# Altium PCB TSAL.PcbDoc
Units mm, origin at the board's own origin, x right, y up, seen from the top; angles counter-clockwise.
Board outline 26.6 x 53.9 mm, 2 copper layers (Top Layer, Bottom Layer), stack 1.671 mm thick; 36 components, 26 nets, 77 pads, 25 vias.
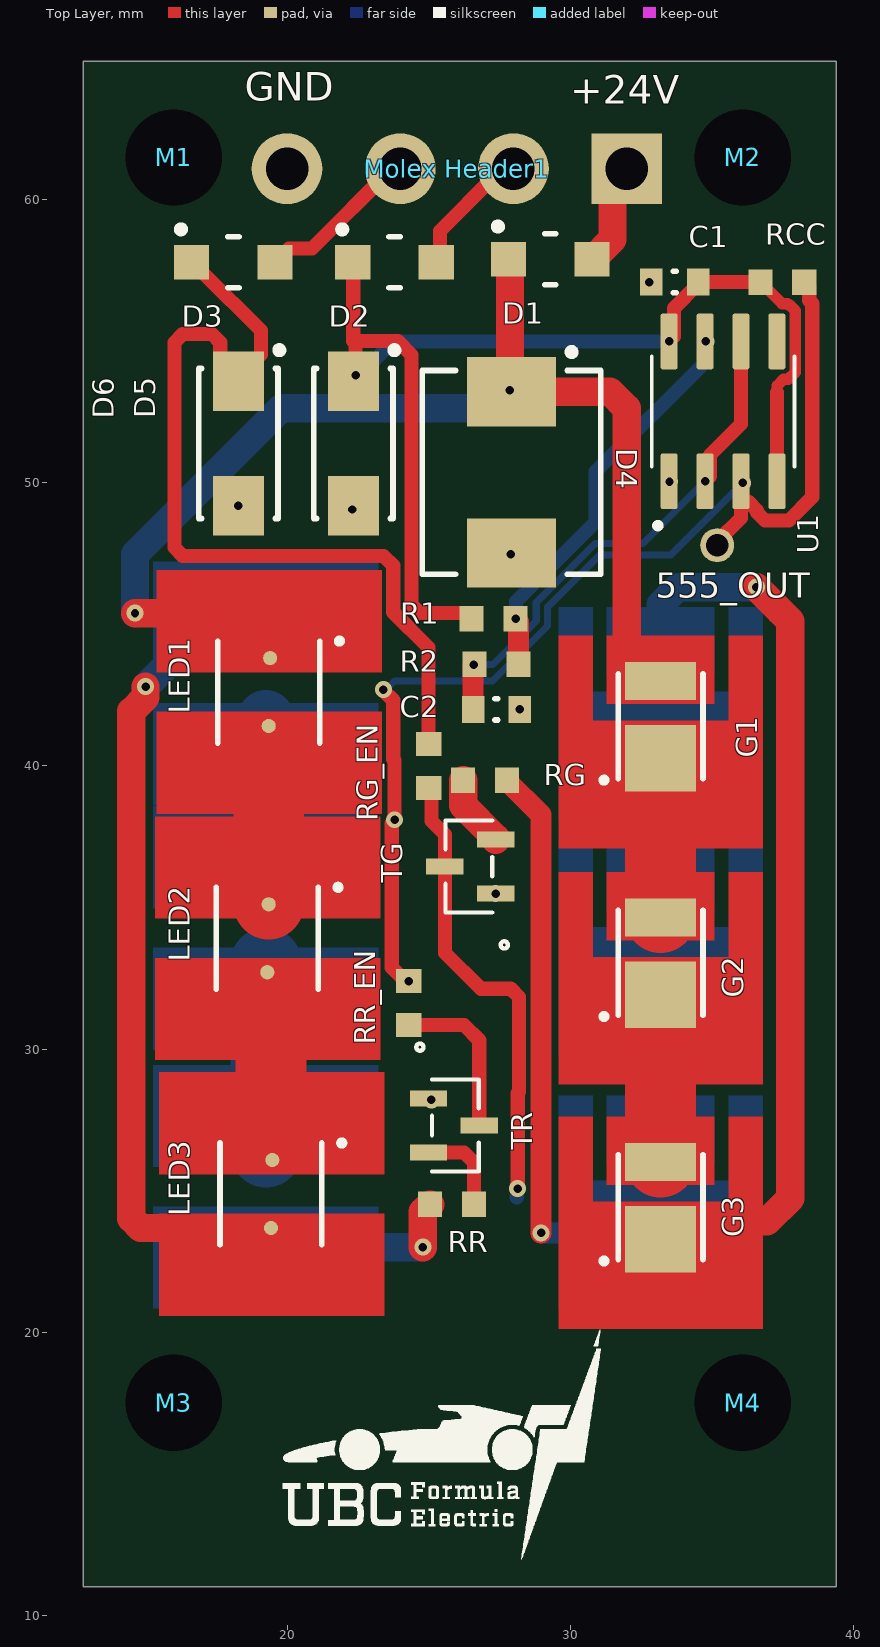
[diagram p0: Top Layer view]
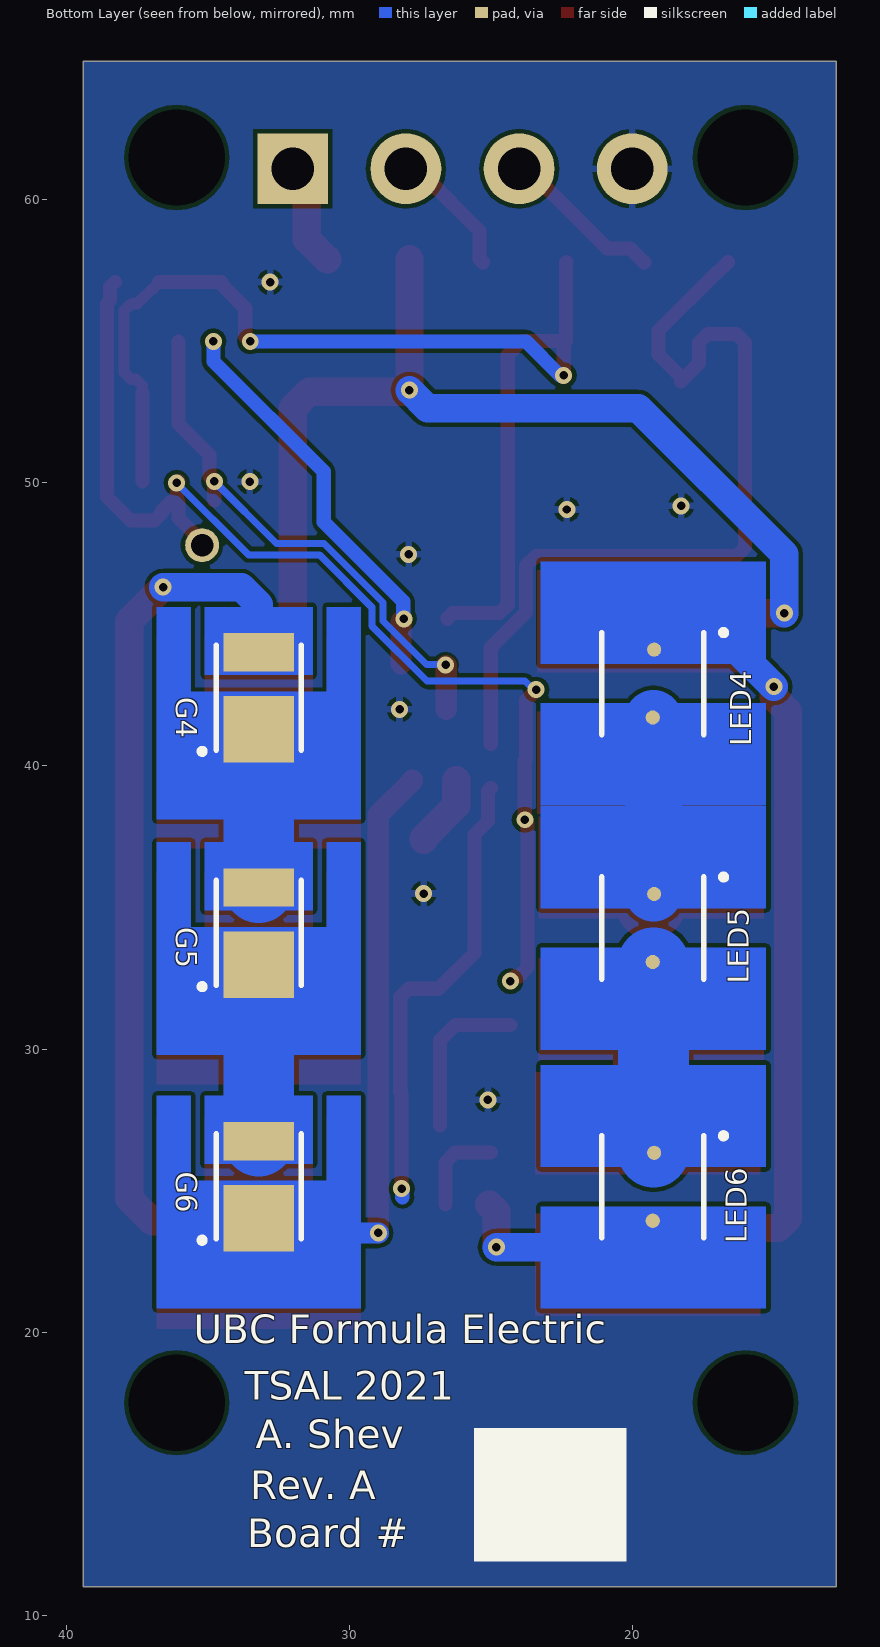
[diagram p1: Bottom Layer view, seen from below]
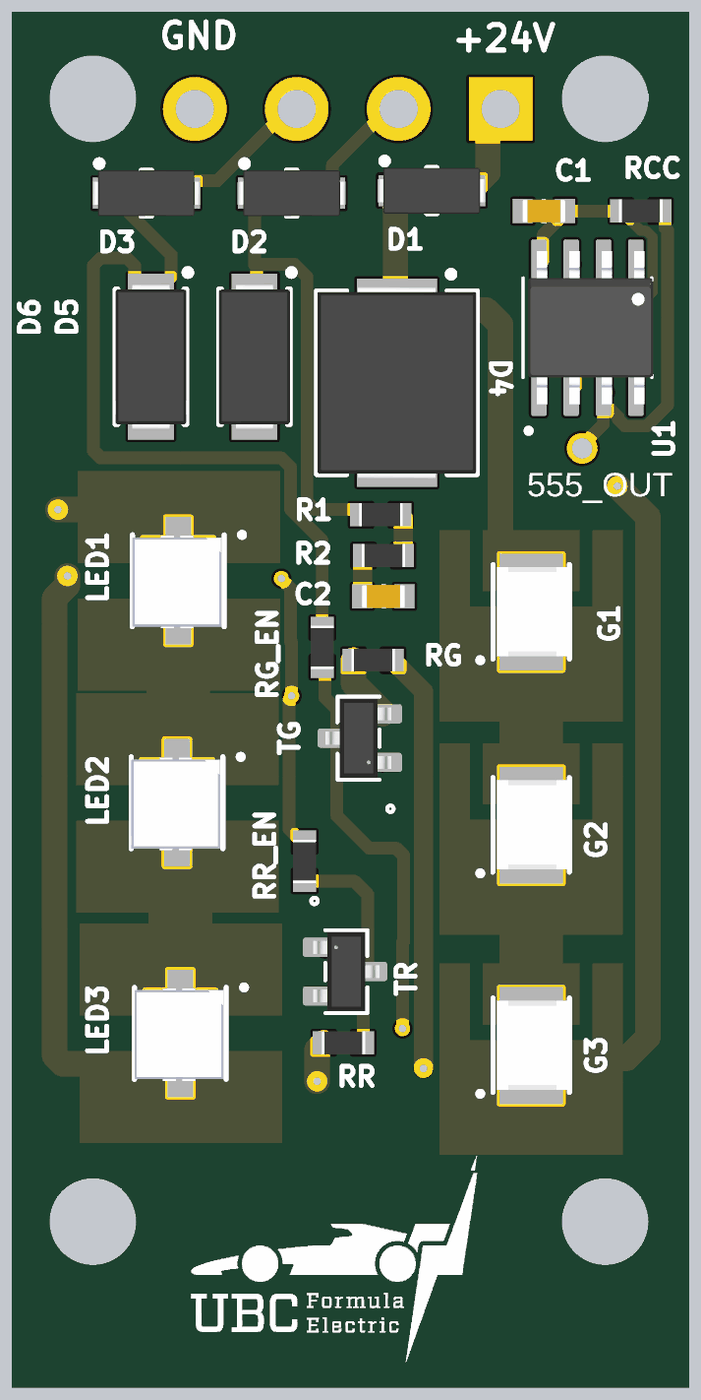
[diagram p2: 3D render of the assembled board from above, using the file's embedded part models]
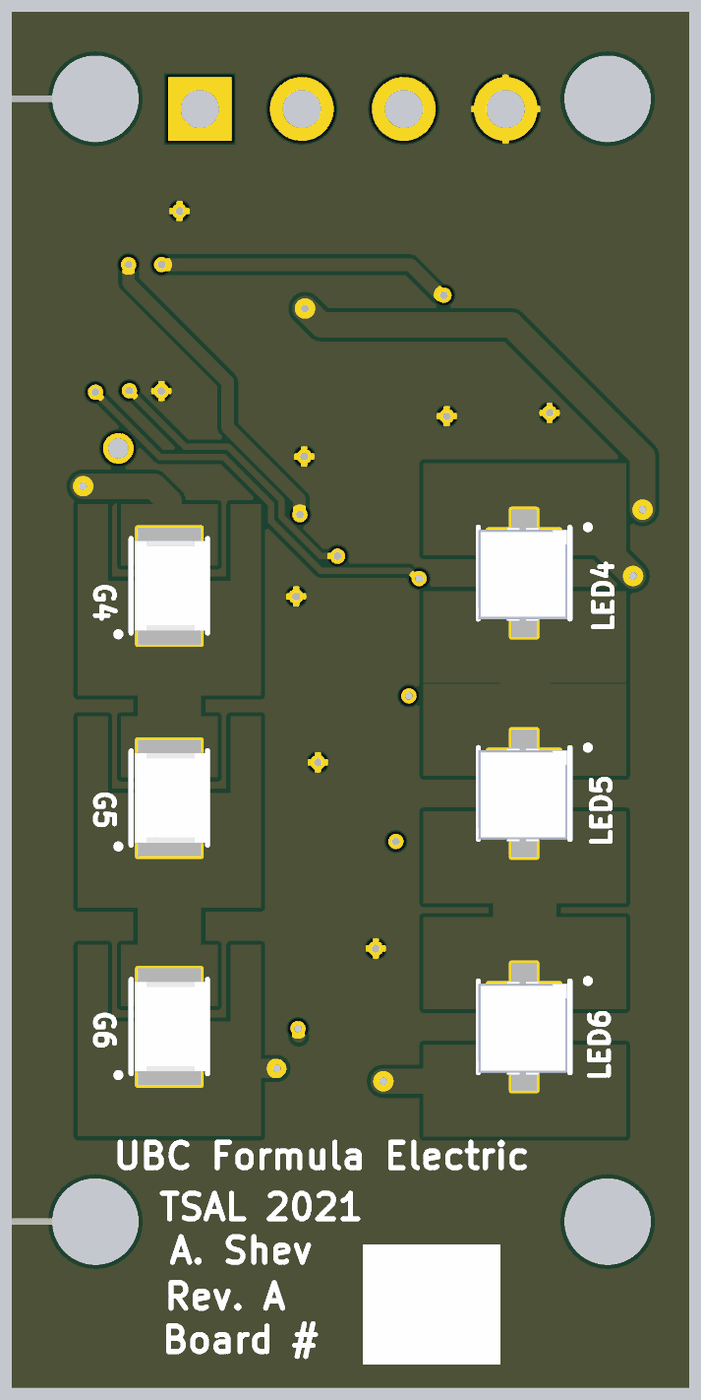
[diagram p3: 3D render of the assembled board from below, using the file's embedded part models]

## Layer stack, top to bottom
Top Solder: solder mask 0.0102, Solder Resist, Dk 3.5
Top Layer: signal copper 0.0356
Dielectric 1: dielectric 1.6, FR-4, Dk 4.8
Bottom Layer: signal copper 0.0356
Bottom Solder: solder mask 0.0102, Solder Resist, Dk 3.5

## Board outline
12.8,64.9 12.8,11 39.4,11 39.4,64.9

## Design rules (kind name [scope] priority, off if disabled: settings)
Clearance [All] p1: gap=0.15 ignorepadtopadclearanceinfootprint=FALSE except(0: Arc-Hole Track-Hole SMDPad-Hole THPad-Hole Via-Hole Fill-Hole Poly-Hole Region-Hole Text-Hole)
ComponentClearance [All] p1: gap=0.25 collisioncheckmode=3 verticalgap=0.25 showdistances=FALSE
DiffPairsRouting [All] p1: maxlimit=10 minlimit=0.2 mostfreqgap=0.25 toplayer_minwidth=0.2 toplayer_maxwidth=10 toplayer_prefwidth=0.5 bottomlayer_minwidth=0.2 bottomlayer_maxwidth=10 bottomlayer_prefwidth=0.5 maxuncoupledlength=12.7
Height [All] p1: minheight=0 maxheight=100 prefheight=0
HoleSize [All] p1: absolutevalues=TRUE maxlimit=12 minlimit=0.3 maxpercent=80.000 minpercent=20.000
HoleToHoleClearance [All] p1: gap=0.25 allowstackedmicrovias=TRUE
MinimumSolderMaskSliver [All] p1: minsoldermaskwidth=0.05
PlaneClearance [All] p1: clearance=0.5
PlaneConnect [All] p1: planeconnectstyle=Relief reliefexpansion=0.25 reliefentries=4 reliefconductorwidth=0.25 reliefairgap=0.25
PolygonConnect [All] p1: connectstyle=Relief reliefconductorwidth=0.25 reliefentries=4 polygonreliefangle="90 Angle" airgapwidth=0.15
RoutingCorners [All] p1: cornerstyle=45-Degree minsetback=2.5 maxsetback=2.5
RoutingVias [All] p1: holewidth=0.3 width=0.6 viastyle="Through Hole" minholewidth=0.3 minwidth=0.5 maxholewidth=1 maxwidth=1.5
SilkToSilkClearance [All] p1: silktosilkclearance=0.25
SilkToSolderMaskClearance [IsPad] p1: minsilkscreentomaskgap=0.1 clearancetoexposedcopper=TRUE
SolderMaskExpansion [All] p1: expansion=0.1 istentingtop=FALSE
Width [All] p1: maxlimit=10 minlimit=0.2 preferedwidth=0.5 minimp=50.000000 maximp=50.000000 favimp=50.000000
19 further rules are at their usual default settings.

## Components (designator, comment, footprint, x,y, rotation, side; value= is the part's Value field where it differs from the comment)
555_OUT "Thru-Hole Test Point" "TESTPOINT (THROUGH-HOLE)" 35.2,47.8 r0 top
C1 "0603" "0603 CAPACITOR (TDK C-SERIES)" 33.7,57.1 r180 top value=0.1uF
C2 "0603 CL10A105KA8NNNC" "0603 CAPACITOR (TDK C-SERIES)" 27.4,42 r0 top value=1uF
D1 "NRVTS260ESFT1G" "ON NRVTS260ESFT1G" 29.3,57.9 r0 top
D2 "NRVTS260ESFT1G" "ON NRVTS260ESFT1G" 23.8,57.8 r0 top
D3 "NRVTS260ESFT1G" "ON NRVTS260ESFT1G" 18.1,57.8 r0 top
D4 "SMCJ24A" "LITTELFUSE SMCJ24A" 27.93,50.376 r270 top value=26.7V
D5 "SMAJ6.0A" "LITTELFUSE SMAJ6.0A" 22.342,51.392 r270 top
D6 "SMAJ6.0A" "LITTELFUSE SMAJ6.0A" 18.278,51.392 r270 top
G1 "XZDG25X109FS" "GREEN LED" 33.2,40.5 r270 top
G2 "XZDG25X109FS" "GREEN LED" 33.2,32.147 r270 top
G3 "XZDG25X109FS" "GREEN LED" 33.2,23.511 r270 top
G4 "XZDG25X109FS" "GREEN LED" 33.2,41.516 r270 bottom
G5 "XZDG25X109FS" "GREEN LED" 33.2,33.203 r270 bottom
G6 "XZDG25X109FS" "GREEN LED" 33.2,24.244 r270 bottom
LED1 "OVS5MRBCR4" "RED LED" 19.352,42.612 r0 top
LED2 "OVS5MRBCR4" "RED LED" 19.302,33.912 r0 top
LED3 "OVS5MRBCR4" "RED LED" 19.432,24.878 r0 top
LED4 "OVS5MRBCR4" "RED LED" 19.278,42.912 r180 bottom
LED5 "OVS5MRBCR4" "RED LED" 19.278,34.276 r180 bottom
LED6 "OVS5MRBCR4" "RED LED" 19.278,25.132 r180 bottom
M1 "M1" "M3 SCREW HOLE (Non-Plated)"#1 16,61.5 r0 top
M2 "M2" "M3 SCREW HOLE (Non-Plated)"#1 36.1,61.5 r0 top
M3 "M3" "M3 SCREW HOLE (Non-Plated)"#2 16,17.25 r0 top
M4 "M4" "M3 SCREW HOLE (Non-Plated)"#3 36.1,18.25 r0 top
"Molex Header1" "MolexHeader" "4-PIN BARE WIRE PADS" 26,61.1 r0 top
R1 "0603" "0603 RESISTOR (YAGEO)" 27.3,45.2 r180 top value=100K
R2 "0603" "0603 RESISTOR (YAGEO)" 27.4,43.6 r0 top value=100K
RCC "0603" "0603 RESISTOR (YAGEO)" 37.5,57.1 r180 top value=1K
RG "0603" "0603 RESISTOR (YAGEO)" 27,39.5 r0 top value=28
RG_EN "0603" "0603 RESISTOR (YAGEO)" 25,40 r90 top value=1k
RR "0603" "0603 RESISTOR (YAGEO)" 25.832,24.508 r180 top value=100
RR_EN "0603" "0603 RESISTOR (YAGEO)" 24.308,31.62 r270 top value=1k
TG "SSTA06HZGT116" TRANSISTOR 26.425,36.446 r90 top
TR "SSTA06HZGT116" TRANSISTOR 25.945,27.297 r270 top
U1 "SA555DRG4" 555TIMER 35.405,52.53 r90 top

## Footprints (in the part's own frame and the unit in brackets; to place one, negate y for a bottom-side part, rotate by r counter-clockwise, add the part's x,y. Pads: shape width x height; smd on the part's side, far side on the other; paste and mask are expansions set on the pad)
"4-PIN BARE WIRE PADS" [mm] "4-Pin Bare Wire Pads"
  round 2.5 hole 1.5: 1(-6,0) 2(-2,0) 3(2,0)
  rect 2.5x2.5 hole 1.5: 4(6,0)
555TIMER [mm]
  rrect25% 1.97x0.6 smd: 1GND(-2.47,1.905) 2TRIG(-2.47,0.635) 3OUT(-2.47,-0.635) 4RESET(-2.47,-1.905) 5CONT(2.47,-1.905) 6THRESH(2.47,-0.635) 7DISCH(2.47,0.635) 8VCC(2.47,1.905)
  silkscreen extent -4.14,-2.53 1.95,2.53, body extent -3,-2.58 3,2.32, height 1.75
"0603 CAPACITOR (TDK C-SERIES)" [mm] "Chip Capacitor, 2-Leads, Body 1.60x0.80mm, IPC Medium Density"
  rect 0.8x0.95 smd: 1(-0.825,0) 2(0.825,0)
  silkscreen extent -0.05,-0.38 0.05,0.38, body extent -0.85,-0.45 0.85,0.45, height 0.9
"0603 RESISTOR (YAGEO)" [mm] "Chip Resistor, 2-Leads, Body 1.60x0.80mm, IPC Medium Density"
  rect 0.85x0.9 smd: 1(-0.775,0) 2(0.775,0)
  body extent -0.85,-0.45 0.85,0.45, height 0.55
"GREEN LED" [mm]
  rect 1.35x2.5 smd: 1(-2.5,0)
  rect 2.35x2.5 smd: 2(0.225,0)
  Top Layer region: -4.1,-3.6 -4.1,-2.4 -1.1,-2.4 -1.1,-1.25 -1.1,1.25 -1.1,2.4 -4.1,2.4 -4.1,3.6 3.4,3.6 3.4,-3.6
  Top Layer region: -4.1,-1.9 -1.7,-1.9 -1.7,-1.25 -1.7,1.25 -1.7,1.9 -4.1,1.9
  silkscreen extent -2.75,-2.07 1.07,1.5, body extent -2.65,-1.35 0.85,1.45, height 0.81
"LITTELFUSE SMAJ6.0A" [mm] "TVS DIODE 6V 10.3V DO214AC"
  rect 2.1x1.8 smd: 1(-2.2,0) 2(2.2,0)
  silkscreen extent -3.42,-1.4 2.65,1.58, body extent -2.86,-1.4 2.86,1.4, height 2.29
"LITTELFUSE SMCJ24A" [mm] "TVS DIODE 24V 38.9V DO214AB"
  rect 2.45x3.15 smd: 1(-2.85,0) 2(2.85,0)
  silkscreen extent -4.37,-3.15 3.6,3.15, body extent -3.77,-3.11 3.77,3.11, height 2.62
"M3 SCREW HOLE (Non-Plated)"#1 [mm]
  round 0 hole 3.4 unplated: 1(0,0)
"M3 SCREW HOLE (Non-Plated)"#2 [mm]
  round 0 hole 3.4 unplated: 1(0,0.25)
"M3 SCREW HOLE (Non-Plated)"#3 [mm]
  round 0 hole 3.4 unplated: 1(0,-0.75)
"ON NRVTS260ESFT1G" [mm] "DIODE SCHOTTKY 60V 2A SOD123FL"
  rect 1.25x1.22 smd: 1(-1.475,0) 2(1.475,0)
  silkscreen extent -1.97,-0.9 0.2,1.28, body extent -2.12,-0.9 2.12,0.9, height 0.98
"RED LED" [mm]
  round 0.5 smd: 1(0.05,1.2) 2(0,-1.2)
  Top Layer region: 4,0.7 4,4.3 -3.95,4.3 -3.95,0.7
  Top Layer region: 4,-0.7 4,-4.3 -3.95,-4.3 -3.95,-0.7
  Top Layer region: -1.4,-0.7 -1.4,-1.7 -0.5,-1.7 -0.5,-2.5 0.5,-2.5 0.5,-1.7 1.4,-1.7 1.4,-0.7
  Top Layer region: -1.4,0.7 -1.4,1.7 -0.5,1.7 -0.5,2.5 0.5,2.5 0.5,1.7 1.4,1.7 1.4,0.7
  silkscreen extent -1.8,-1.8 2.57,1.87, body extent -1.8,-1.86 1.7,1.76, height 1.26
"TESTPOINT (THROUGH-HOLE)" [mm] "Testpoint through-hole via"
  round 1.2 hole 0.8 paste-1: 1(0,0)
TRANSISTOR [mil]
  rect 22x52 smd paste+3.86 mask+4: 1(-37.5,-37.21) 2(0,33.36) 3(37.5,-37.21)
  silkscreen extent -114,-54 64,33, body extent -61,-51 61,51, height 47

## Part data
C1: library part "0603 Ceramic Capacitor", Supplier Part Number 1=399-17393-1-ND, Supplier 1=Digi-Key
C2: library part "0603 Ceramic Capacitor", "CAP CER 1UF 25V X5R 0603", Supplier Part Number 1=1276-1102-1-ND, Supplier 1=Digi-Key
D1 D2 D3: library part "ON NRVTS260ESFT1G", "Diode Schottky 60V 2A Surface Mount SOD-123FL", Supplier Part Number 1=NRVTS260ESFT1GOSCT-ND, Supplier 1=Digi-Key
D4: library part "Littelfuse SMCJ24A", "38.9V Clamp 38.6A Ipp Tvs Diode Surface Mount DO-214AB (SMCJ)", Supplier Part Number 1=SMCJ24ALFCT-ND, Supplier 1=Digikey
D5 D6: library part "LF SMAJ6.0A", "10.3V Clamp 38.8A Ipp Tvs Diode Surface Mount DO-214AC (SMA)", Supplier Part Number 1=SMAJ6.0ALFCT-ND, Supplier 1=Digi-Key
G1 G2 G3 G4 G5 G6: library part "GREEN LED", "Green 525nm LED Indication - Discrete 3.5V 1411 (3528 Metric)", Supplier Part Number 1=1497-1345-1-ND, Supplier 1=Digikey
LED1 LED2 LED3 LED4 LED5 LED6: library part "RED LED", "Red 625nm LED Indication - Discrete 2.2V 2-SMD, No Lead", Supplier Part Number 1=365-1546-1-ND, Supplier 1=Digikey
M1 M2 M3 M4: library part "M3 Non-Plated Mounting Holes"
R1 R2: library part "0603 Resistor", "0603 Resistor", Supplier Part Number 1=YAG1235CT-ND, Supplier 1=Digi-Key
RCC: library part "0603 Resistor", "RES SMD 1 OHM 1% 1/3W 0603", Supplier Part Number 1=541-1.00KSCT-ND, Supplier 1=Digi-Key
RG: library part "0603 Resistor", "RES SMD 28 OHM 1% 1/3W 0603", Supplier Part Number 1=541-28.0SCT-ND, Supplier 1=Digi-Key
RG_EN RR_EN: library part "0603 Resistor", Supplier Part Number 1=541-1.00KSCT-ND, Supplier 1=Digi-Key
RR: library part "0603 Resistor", "RES SMD 100 OHM 2% 1.5W 0603", Supplier Part Number 1=541-2653-1-ND, Supplier 1=Digi-Key
TG TR: "Bipolar (BJT) Transistor NPN 100MHz Surface Mount SST3", Built_By=EMA_Matt, Copyright="Copyright (C) 2018 Accelerated Designs. All rights reserved", Manufacturer_Part_Number=SSTA06HZGT116, RefDes=RefDes, SourceLibrary=Rohm_2019-09-23, Type=DEV, Vendor="ROHM Semiconductor"
U1: "Precision timer for -55 to 85C operation 8-SOIC -40 to 85", Package="SOIC-8 Texas Instruments", Supplier Part Number=296-48948-1-ND, Check_prices=https://www.snapeda.com/parts/SA555DRG4/Texas%20Instruments/view-part/387582/?ref=eda, MF="Texas Instruments", MP=SA555DRG4, Purchase-URL=https://pricing.snapeda.com/search/part/SA555DRG4/?ref=eda, SnapEDA_Link=https://www.snapeda.com/parts/SA555DRG4/Texas%20Instruments/view-part/387582/?ref=snap, Supplier=Digi-Key

## Via types
v1: diameter 0.6, hole 0.3, Top Layer to Bottom Layer, 25 vias

## Nets (pads, with @x,y where several pads share a name; then routed paths per layer and width w, separated by ;. In a path a pad name is that pad's centre, name@x,y a point inside that pad or via, vN(x,y) a via of type N, cw(c..) or ccw(c..) an arc to the next point about the centre after c; other vN are vias at no path point)
GND: "Molex Header1.1" C1.2 C2.2 D4.2 D5.2 D6.2 TG.1 TR.1 U1.1GND | length 0.2
  Top Layer w0.25: v1(32.8,57.1) C1.2 ; U1.1GND v1(33.514,50.046)
  Top Layer w0.5: v1(27.905,47.48) 27.905,47.501 D4.2 ; v1(28.225,42) C2.2@28.241,41.984
  other v1: 25.1,28.2 27.37,35.493 22.313,49.062 18.278,49.192
"GREEN_EN (5V)": D3.1 D6.1 RG_EN.2 | length 31.1
  Top Layer w0.5: D3.1 16.985,57.44 17.017,57.44 19.074,55.383 19.074,54.538 18.278,53.742 D6.1 17.64,54.23 17.64,54.965 17.347,55.258 16.314,55.258 16.021,54.965 16.021,47.716 16.314,47.423 23.407,47.423 23.752,47.078 23.752,45.43 25,44.182 RG_EN.2
Net555_OUT_1: 555_OUT.1 RCC.1 RR_EN.1 U1.3OUT | length 40.4
  Top Layer w0.5: v1(23.4,42.7) 23.4,42.673 23.752,42.321 23.752,40.248 23.8,40.2 23.8,38.073 23.702,37.975 23.702,32.877 24.009,32.57 24.133,32.57 v1(24.308,32.395) ; 555_OUT.1 35.2,47.929 36.035,48.764 U1.3OUT@36.035,49.325 ; U1.3OUT v1(36.1,50) ; U1.3OUT@36.09,49.98 36.09,49.325 36.317,49.325 36.61,49.032 36.61,48.953 36.888,48.675 37.732,48.675 38.56,49.503 38.56,56.335 38.45,56.445 38.45,56.925 RCC.1
  Bottom Layer w0.25: v1(23.4,42.7) 23.495,42.7 23.795,43 27.254,43 29.205,44.951 29.205,45.61 31.057,47.461 33.561,47.461 v1(36.1,50)
  other v1: 23.8,38.1
NetC2_1: C2.1 R2.1 U1.2TRIG U1.6THRESH | length 19
  Top Layer w0.25: R2.1@26.575,43.55 v1(26.6,43.575)
  Top Layer w0.5: U1.2TRIG@34.77,49.375 v1(34.77,50.06) 34.945,50.235 34.945,50.984 36.04,52.079 U1.6THRESH
  Top Layer w0.75: C2.1 R2.1@26.575,43.55
  Bottom Layer w0.25: v1(26.6,43.575) 26.612,43.587 27.275,43.587 28.805,45.117 28.805,45.776 30.891,47.861 32.571,47.861 v1(34.77,50.06)
NetD1_2: "Molex Header1.4" D1.2 | length 3.7
  Top Layer w1: D1.2 30.79,57.9 31.5,58.61 31.5,60.6 32,61.1
NetD2_2: "Molex Header1.3" D2.2 | length 4.4
  Top Layer w0.5: D2.2 25.29,57.8 25.4,57.91 25.4,58.9 27.3,60.8 27.9,60.8
NetD3_2: "Molex Header1.2" D3.2 | length 5.8
  Top Layer w0.5: D3.2 19.59,57.8 20.075,58.285 20.885,58.285 23.7,61.1 24,61.1
NetG1_2: G1.2 G2.1 | length 5.6
  Top Layer w2.5: G2.1 G1.2
NetG2_2: G2.2 G3.1 | length 5.9
  Top Layer w2.5: G3.1 G2.2
NetG3_2: G3.2 G4.1 | length 32.6
  Top Layer w1: G3.2 33.818,23.904 36.961,23.904 37.778,24.72 37.778,45.121 37.414,45.485 v1(36.58,46.319)
  Bottom Layer w1: G4.1 33.2,45.7 33.819,46.319 v1(36.58,46.319)
NetG4_2: G4.2 G5.1 | length 5.6
  Bottom Layer w2.5: G5.1 G4.2
NetG5_2: G5.2 G6.1 | length 6.2
  Bottom Layer w2.5: G6.1 G5.2
NetG6_2: G6.2 RG.2 | length 20.9
  Top Layer w0.75: RG.2 27.775,39.475 28.975,38.275 v1(28.975,23.5)
  Bottom Layer w0.5: G6.2@32.99,23.81 G6.2
  Bottom Layer w0.75: v1(28.975,23.5) 32.681,23.5 G6.2@32.99,23.81
NetLED1_2: LED1.2 LED2.1 | length 5
  Top Layer w2.5: LED2.1 19.352,40.112
NetLED2_2: LED2.2 LED3.1 | length 4.1
  Top Layer w0.5: 19.302,31.412 19.432,31.282
  Top Layer w2.5: 19.432,27.378 19.432,31.282
NetLED3_2: LED3.2 LED4.1 | length 29.2
  Top Layer w1: v1(15.001,42.8) 14.998,42.797 14.998,42.427 14.5,41.929 14.5,24.01 14.832,23.678 LED3.2
  Bottom Layer w1: v1(15.001,42.8) 18.141,45.94 18.801,45.94
NetLED4_2: LED4.2 LED5.1 | length 6.3
  Bottom Layer w0.5: LED5.1 LED5.1@19.253,35.501 ; LED4.2@19.253,41.687 LED4.2
  Bottom Layer w2: LED5.1@19.253,35.501 LED4.2@19.253,41.687
NetLED5_2: LED5.2 LED6.1 | length 6.8
  Bottom Layer w0.5: LED6.1 LED6.1@19.253,26.357 ; LED5.2@19.253,33.051 LED5.2
  Bottom Layer w2.5: LED6.1@19.253,26.357 LED5.2@19.253,33.051
NetLED6_2: LED6.2 RR.2 | length 7.3
  Top Layer w1: v1(24.8,23) 24.8,24.251 RR.2
  Bottom Layer w1: 19.278,22.632 19.646,23 v1(24.8,23)
NetR1_1: R1.1 R2.2 U1.7DISCH | length 14.3
  Top Layer w0.25: v1(28.075,45.2) R1.1@28.175,45.1 ; U1.7DISCH v1(34.8,55)
  Top Layer w0.75: R2.2 R1.1@28.175,45.1
  Bottom Layer w0.5: v1(28.075,45.2) 28.094,45.219 28.094,45.807 30.905,48.618 30.905,50.4 34.8,54.295 v1(34.8,55)
NetRG_1: RG.1 TG.3 | length 2.6
  Top Layer w1: RG.1 26.225,38.604 27.37,37.459 TG.3
NetRG_EN_1: RG_EN.1 TG.2 | length 16.4
  Top Layer w0.5: RG_EN.1 25.102,39.123 25.102,38.05 25.578,37.574 TG.2 25.578,33.398 26.848,32.128 27.907,32.128 28.2,31.835 28.2,28.489 28.15,28.439 v1(28.15,25.066)
  Bottom Layer w0.5: 28.118,24.762 28.131,24.775 28.131,25.047 v1(28.15,25.066)
NetRR_1: RR.1 TR.3 | length 3.2
  Top Layer w0.5: TR.3 26.255,26.345 26.607,25.993 RR.1
NetRR_EN_2: RR_EN.2 TR.2 | length 5.7
  Top Layer w0.5: RR_EN.2 26.255,30.845 26.792,30.307 TR.2
"RED_EN (5V)": C1.1 D2.1 D5.1 R1.2 RCC.2 U1.4RESET U1.8VCC | length 41.8
  Top Layer w0.4: RCC.2 36.725,57.075 36.95,56.85 36.975,56.85 37.49,56.335 37.67,56.335 37.705,56.3 37.746,56.3 37.96,56.086 37.96,53.914 37.711,53.665 37.544,53.665 37.31,53.431 37.31,53.2
  Top Layer w0.5: D2.1 22.342,57.783 22.342,55.011 ; v1(22.425,53.8) 22.425,54.928 22.342,55.011 ; R1.2 26.525,45.225 26.35,45.4 26.063,45.4 26.057,45.406 24.695,45.406 24.402,45.699 24.402,54.521 23.913,55.011 22.342,55.011 ; v1(33.5,55) 33.675,55.175 33.675,56.175 34.525,57.025 C1.1 RCC.2 ; U1.4RESET 37.31,53.2
  Bottom Layer w0.5: v1(22.425,53.8) 22.55,53.8 23.75,55 v1(33.5,55)
VCC: D1.1 D4.1 G1.1 LED1.1 | length 42.1
  Top Layer w1: v1(14.628,45.4) 19.064,45.4 19.352,45.112 ; D1.1@27.875,57.9 v1(27.875,53.281) D4.1 31.414,53.226 32,52.64 32,43.625 32.625,43 G1.1
  Bottom Layer w1: v1(14.628,45.4) 14.628,47.481 19.789,52.642 27.236,52.642 v1(27.875,53.281)
pads on no net: M1.1 M2.1 M3.1 M4.1 U1.5CONT

## Polygon pours and split planes (outlines as drawn)
GND on Bottom Layer "GND_L02_P000" (solid, pour order 0): 12.8,64.9 12.8,11 39.4,11 39.4,64.9

## Silkscreen, mask and mechanical layers (free items; w line width, h text height)
Top Overlay:
  drawing of 2556 lines, arcs and shapes, not listed
Bottom Overlay:
  region: 25.6,16.6 20.2,16.6 20.2,11.9 25.6,11.9
  text "UBC Formula Electric" at 35.5,19.6 h1
  text "TSAL 2021" at 33.7,17.6 h1
  text "A. Shev" at 33.3,15.9 h1
  text "Rev. A" at 33.5,14.1 h1
  text "Board #" at 33.6,12.4 h1

## Dimensions
16,61.5 to 36.1,61.5 on Drill Guide
36.1,61.5 to 36.1,17.5 on Bottom Paste
39.4,64.9 to 39.4,11 on Drill Guide
12.8,64.9 to 39.4,64.9 on Drill Guide

## Text inside footprints (layer, text, board x,y; h text height)
"Molex Header1": Top Overlay "GND" at 18.5,63.5 h1; Top Overlay "+24V" at 30,63.4 h1